# Altium PCB jetson_nano_breakout_rev1.PcbDoc
Units mil, origin at the board's own origin, x right, y up, seen from the top; angles counter-clockwise.
Board outline 3903.1 x 2481.1 mil, 2 copper layers (Top Layer, Bottom Layer); 58 components, 76 nets, 270 pads, 57 vias.
Unrouted connection lines stored in the file: 13.
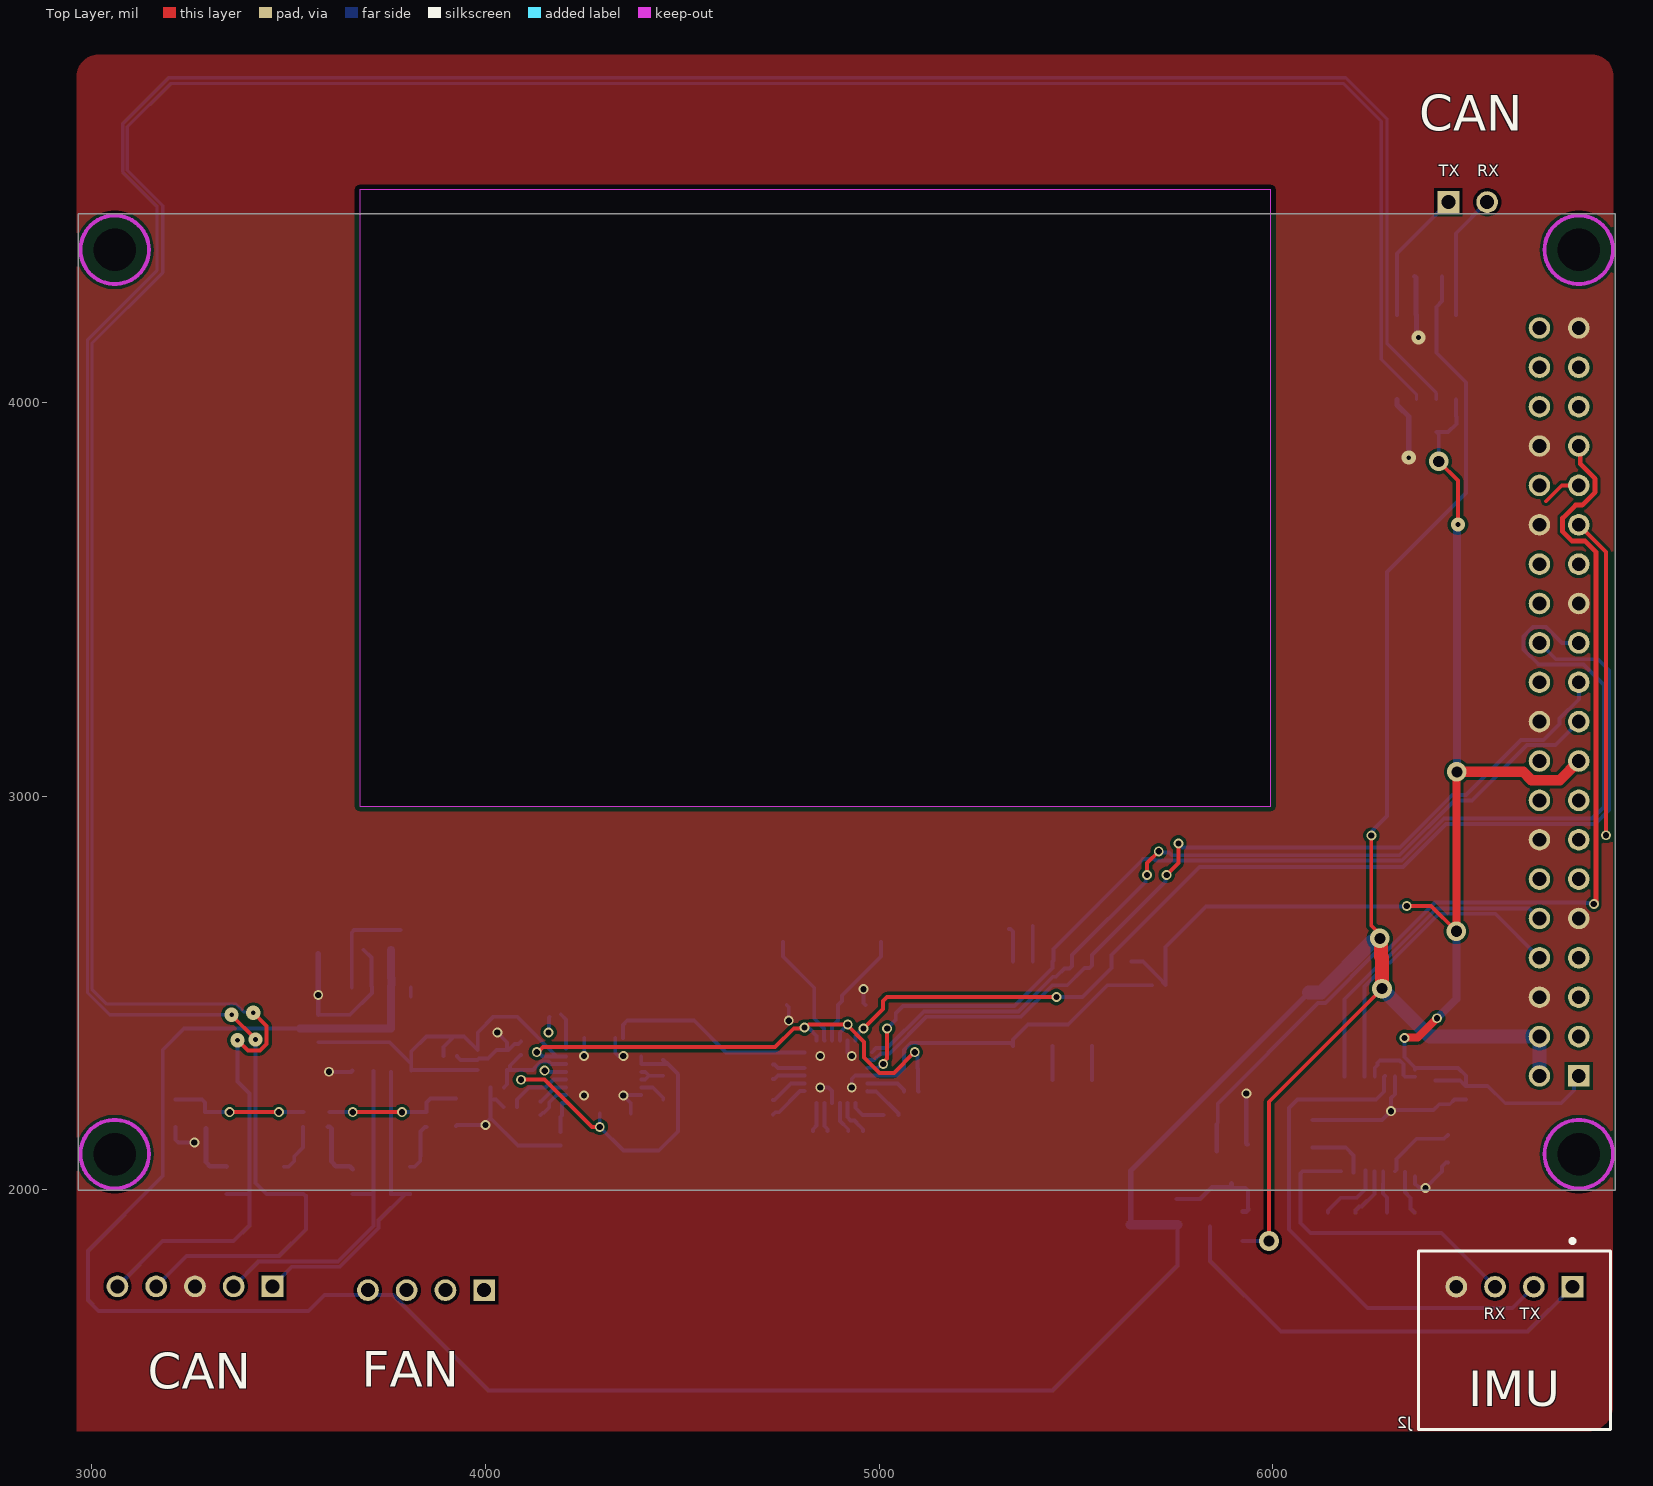
[diagram p0: Top Layer view]
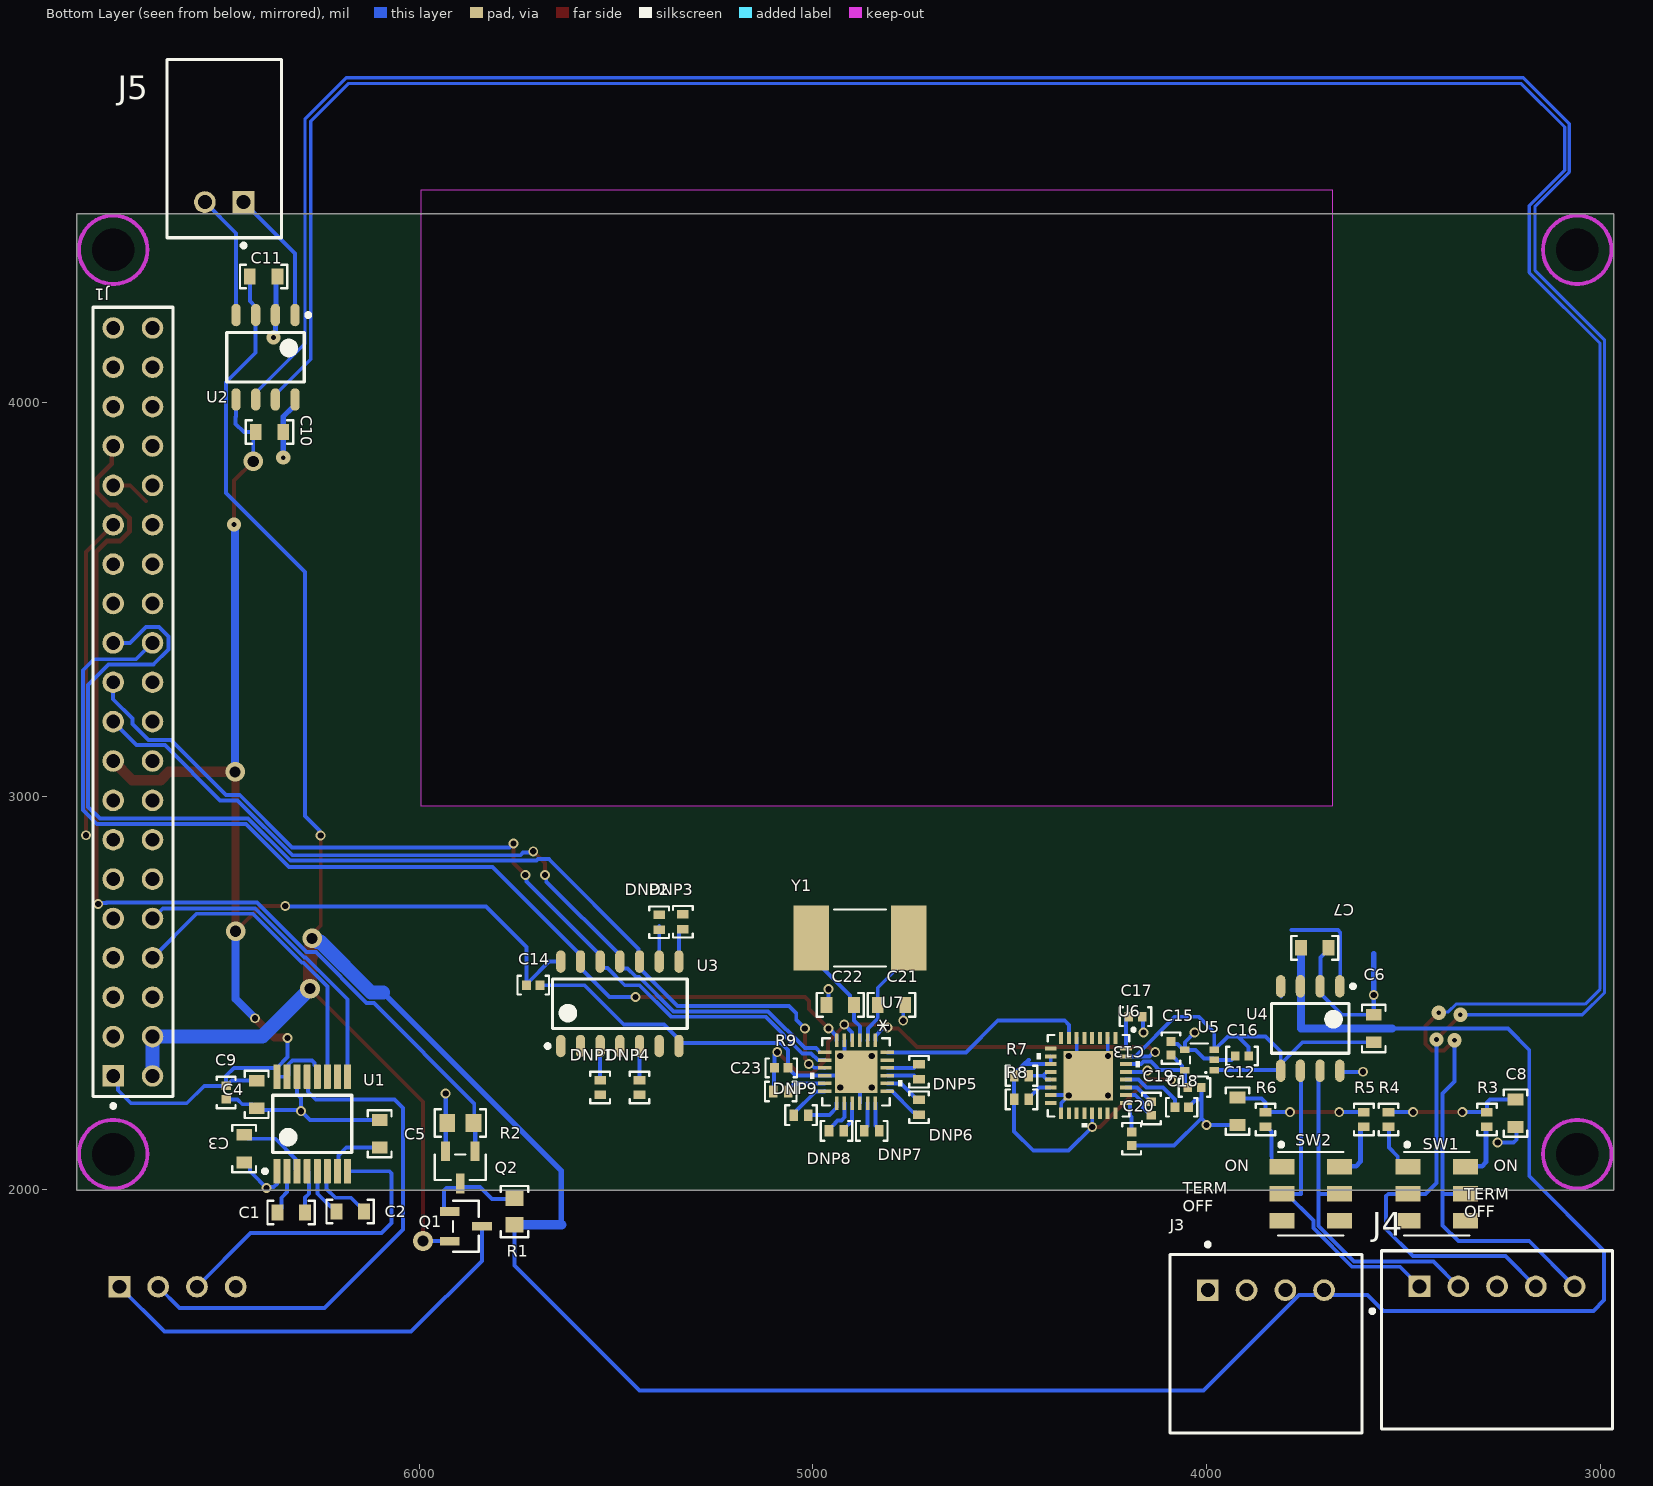
[diagram p1: Bottom Layer view, seen from below]

## Layer stack, top to bottom
Top Solder: solder mask 0.4, Solder Resist, Dk 3.5
Top Layer: signal copper 1.4
Dielectric 1: dielectric 12.6, FR-4, Dk 4.8
Bottom Layer: signal copper 1.4
Bottom Solder: solder mask 0.4, Solder Resist, Dk 3.5

## Board outline
2965.95,1998.95 6869.05,1998.95 6869.05,4480.05 2965.95,4480.05
cut-out: 3680,4541 3680,2974 5995,2974 5995,4541

## Design rules (kind name [scope] priority, off if disabled: settings)
AcuteAngle [All] p1: minimum=8.00000000000000E+0001 checktracksonly=FALSE
BoardOutlineClearance "BoardOutlineClearance JLCPCB" [All] p1: gap=11.81 ignorepadtopadclearanceinfootprint=FALSE
Clearance "Clearance JLCPCB 4 layer" [All] p1: gap=7.87 ignorepadtopadclearanceinfootprint=FALSE except(3.54: Arc-Arc Arc-Track Track-Track; 5: Arc-SMDPad Arc-Via Track-SMDPad Track-Via SMDPad-SMDPad; 9.45: THPad-THPad THPad-Via Via-Via; 10: Arc-Hole Track-Hole SMDPad-Hole THPad-Hole Via-Hole Fill-Hole Poly-Hole Region-Hole Text-Hole)
DiffPairsRouting "Diff Pairs USB 2.0" [InDifferentialPairClass('USB 2.0')] p1: maxlimit=5 minlimit=5 mostfreqgap=5 toplayer_minwidth=7.87 toplayer_maxwidth=7.87 toplayer_prefwidth=7.87 bottomlayer_minwidth=7.87 bottomlayer_maxwidth=7.87 bottomlayer_prefwidth=7.87 impedanceprofiledriven=TRUE impedanceprofileid={9C1C01C3-81FD-4AE1-9E3D-BC841176F5CA} maxuncoupledlength=500
DiffPairsRouting "Diff Pairs PCIe Gen 2" [InDifferentialPairClass('PCIe Gen 2')] p2: maxlimit=5 minlimit=5 mostfreqgap=5 toplayer_minwidth=5.53 toplayer_maxwidth=5.53 toplayer_prefwidth=5.53 bottomlayer_minwidth=5.53 bottomlayer_maxwidth=5.53 bottomlayer_prefwidth=5.53 impedanceprofiledriven=TRUE impedanceprofileid={D86E5A41-F98B-413D-93FD-A6E48D035561} maxuncoupledlength=500
HoleSize "HoleSize JLCPCB Pad" [IsPad] p1: absolutevalues=TRUE maxlimit=248.03 minlimit=19.68 maxpercent=80.000 minpercent=20.000
HoleSize "HoleSize JLCPCB 4 layer Cheap" [All] p2: absolutevalues=TRUE maxlimit=248.03 minlimit=11.81 maxpercent=80.000 minpercent=20.000
HoleToHoleClearance "HoleToHoleClearance JLCPCB Same Net" [All] p1: gap=10 allowstackedmicrovias=TRUE
MinimumAnnularRing "MinimumAnnularRing JLCPCB Via" [All] p1: minimumring=2.95
MinimumAnnularRing "MinimumAnnularRing JLCPCB Pad" [IsPad] p2: minimumring=9.84
MinimumAnnularRing "MinimumAnnularRing JLCPCB 1oz" [All] p3: minimumring=5.12
MinimumSolderMaskSliver "MinimumSolderMaskSliver JLCPCB" [All] p1: minsoldermaskwidth=3.94
PlaneClearance [All] p1: clearance=11.81
PlaneConnect [All] p1: planeconnectstyle=Direct reliefexpansion=20 reliefentries=4 reliefconductorwidth=10 reliefairgap=10
PolygonConnect [All] p1: connectstyle=Direct reliefconductorwidth=15 reliefentries=4 polygonreliefangle="45 Angle" airgapwidth=10
RoomDefinition jetson_nano_breakout_rev1 [InComponentClass('jetson_nano_breakout_rev1')] p1: confinementstyle=ConfineIn formatcopy=TRUE lockcomponents=FALSE outline 10550,1980 9560,1980 9560,2440 10550,2440
RoutingVias "RoutingVias JLCPCB 4 layer" [All] p1: holewidth=19.68 width=39.37 viastyle="Through Hole" minholewidth=11.81 minwidth=17.72 maxholewidth=50 maxwidth=80 useviatemplates=TRUE viatemplateguid#1={E4F56293-08C2-4D19-82C4-AE08438917D5} viatemplateguid#2={1BCA9F14-5F09-4202-A85E-663B4EEF2BCF} viatemplateguid#3={0A06A7A9-53EB-413F-AE2C-1D9530B3FFA7} viatemplatename#1=v64h41 viatemplatename#2=v127h71 viatemplatename#3=v274h274
SilkToSilkClearance [All] p1: silktosilkclearance=3
SilkToSolderMaskClearance "SilkToSolderMaskClearance JLCPCB" [IsPad] p1: minsilkscreentomaskgap=5.91 clearancetoexposedcopper=TRUE
SolderMaskExpansion "SolderMaskExpansion JLCPCB" [All] p1: expansion=1.5 istentingtop=FALSE
SupplyNets "Schematic Supply Nets_3" [InNet('1V8')] p1: voltage=0.000
SupplyNets "Schematic Supply Nets_2" [InNet('+5')] p2: voltage=0.000
SupplyNets "Schematic Supply Nets_1" [InNet('3v3')] p3: voltage=0.000
SupplyNets "Schematic Supply Nets" [InNet('GND')] p4: voltage=0.000
UnRoutedNet [All] p1: checkbadconnections=TRUE
Width "Width JLCPCB 4 layer" [All] p1: maxlimit=196.85 minlimit=3.54 preferedwidth=9.84 minimp=50.000000 maximp=50.000000 favimp=50.000000
21 further rules are at their usual default settings.

## Classes and differential pairs
component class SPItoRS422: C13 C14 C15 C16 C17 C18 C19 C20 C21 C22 C23 DNP5 DNP6 DNP7 DNP8 DNP9 R7 R8 R9 U5 U6 U7 Y1
component class jetson_nano_breakout_rev1: C1 C2 C3 C4 C5 C6 C7 C8 C9 C10 C11 C12 DNP1 DNP2 DNP3 DNP4 J1 J2 J3 J4 J5 Q1 Q2 R1 R2 R3 R4 R5 R6 SW1 SW2 U1 U2 U3 U4

## Components (designator, comment, footprint, x,y, rotation, side; value= is the part's Value field where it differs from the comment)
C1 "100nF Ceramic 6.3V" CAPACITOR_0603 6325,1942.5 r180 bottom value=0.1uF
C2 "100nF Ceramic 6.3V" CAPACITOR_0603 6175,1945 r180 bottom value=0.1uF
C3 "100nF Ceramic 6.3V" CAPACITOR_0603 6444.29,2105 r270 bottom value=0.1uF
C4 "100nF Ceramic 6.3V" CAPACITOR_0603 6412.5,2242.5 r270 bottom value=0.1uF
C5 "100nF Ceramic 6.3V" CAPACITOR_0603 6100,2142.5 r90 bottom value=0.1uF
C6 "1uF Ceramic 16V" CAPACITOR_0603 3575,2410 r90 bottom locked value=1uF
C7 "10uF Ceramic 6.3V" CAPACITOR_0603 3725,2615 r180 bottom locked
C8 "10nF Ceramic 6.3V" CAPACITOR_0603 3215,2195 r90 bottom locked value=10nF
C9 "100nF Ceramic 25V" CAPACITOR_0402 6490,2247.13 r270 bottom value=0.1uF
C10 "1uF Ceramic 16V" CAPACITOR_0603 6380,3925 r180 bottom value=1uF
C11 "10uF Ceramic 6.3V" CAPACITOR_0603 6395,4320 r180 bottom
C12 "10nF Ceramic 6.3V" CAPACITOR_0603 3921.01,2200 r90 bottom locked value=10nF
C13 "100nF Ceramic 25V" CAPACITOR_0402 4030,2260 r180 bottom value=0.1uF
C14 "1uF Ceramic 16V" CAPACITOR_0402 5710,2520 r180 bottom value=1uF
C15 "1uF Ceramic 16V" CAPACITOR_0402 4090,2360 r90 bottom value=1uF
C16 "1uF Ceramic 16V" CAPACITOR_0402 3910,2340 r0 bottom value=1uF
C17 "100nF Ceramic 25V" CAPACITOR_0402 4180,2440 r180 bottom value=0.1uF
C18 "100nF Ceramic 25V" CAPACITOR_0402 4062.87,2210 r180 bottom value=0.1uF
C19 "100nF Ceramic 25V" CAPACITOR_0402 4140,2207.13 r270 bottom value=0.1uF
C20 "100nF Ceramic 25V" CAPACITOR_0402 4190,2130 r270 bottom value=0.1uF
C21 "18pF Ceramic 50V" CAPACITOR_0603 4800,2470 r0 bottom value=18pF
C22 "18pF Ceramic 50V" CAPACITOR_0603 4930,2470 r180 bottom value=18pF
C23 "100nF Ceramic 25V" CAPACITOR_0402 5080,2310 r180 bottom value=0.1uF
DNP1 "DNP" RESISTOR_0402 5540,2260 r270 bottom
DNP2 "DNP" RESISTOR_0402 5390,2680 r270 bottom
DNP3 "DNP" RESISTOR_0402 5330,2681.3 r270 bottom
DNP4 "DNP" RESISTOR_0402 5440,2260 r270 bottom
DNP5 "DNP" RESISTOR_0402 4730,2300 r90 bottom
DNP6 "DNP" RESISTOR_0402 4730,2210 r90 bottom
DNP7 "DNP" RESISTOR_0402 4850,2150 r180 bottom
DNP8 "DNP" RESISTOR_0402 4940,2150 r180 bottom
DNP9 "DNP" RESISTOR_0402 5030,2190 r180 bottom
J1 "7-534206-0" FP-7-534206-0-MFG 6727,3239.5 r90 bottom
J2 "S4B-XH-A(LF)(SN)" JST-S4B-XH-A(LF)(SN)_V 6613.36,1754 r180 top
J3 "S4B-XH-A(LF)(SN)" JST-S4B-XH-A(LF)(SN)_V 3848.81,1745.2 r180 bottom
J4 "S5B-XH-A(LF)(SN)" FP-S5B-XH-A_LF_SN-MFG 3261.85,1619.17 r0 bottom locked
J5 "S2B-XH-A-GU" FP-S2B-XH-A-GU-MFG 6495,4645 r0 bottom
Q1 "MOSFET P-CHANNEL 20V 4.7A SOT23" SOT-23-3 5881.35,1907.5 r270 bottom
Q2 "MOSFET N-CH 30V 5.8A SOT-23-3" SOT-23-3 5895.48,2057.5 r0 bottom
R1 "10k Ohm 5% 1/10W" RESISTOR_0603 5757.5,1945 r90 bottom
R2 "10k Ohm 5% 1/10W" RESISTOR_0603 5895,2170 r0 bottom
R3 "60.4 Ohm 1% 1/16W" RESISTOR_0402 3287.5,2178.7 r90 bottom locked
R4 "60.4 Ohm 1% 1/16W" RESISTOR_0402 3537.5,2178.7 r90 bottom locked
R5 "60.4 Ohm 1% 1/16W" RESISTOR_0402 3600,2178.8 r90 bottom locked
R6 "60.4 Ohm 1% 1/16W" RESISTOR_0402 3850,2178.7 r90 bottom locked
R7 "0 Ohm 1% 1/16W" RESISTOR_0402 4470,2290 r0 bottom
R8 "0 Ohm 1% 1/16W" RESISTOR_0402 4470,2230 r0 bottom
R9 "1k Ohm 1% 1/16W" RESISTOR_0402 5081.3,2250 r0 bottom
SW1 "Switch DPDT" CAS-220TA 3415,1990 r270 bottom locked
SW2 "Switch DPDT" CAS-220TA 3735,1990 r270 bottom locked
U1 "SN65C3221EPWR" PW0016A_M 6271.36,2167.5 r90 bottom
U2 "CAN Transceiver" SOIC-8 6390,4115 r270 bottom
U3 "MCP2517FD" SOIC-14 5490,2472.72 r90 bottom
U4 "CAN Transceiver" SOIC-8 3736.32,2410 r270 bottom locked
U5 "TLV70018DCKR" SOT-353 3980,2330 r90 bottom
U6 "SP335EER1-L" QFN-32 4300,2290 r270 bottom
U7 "PI7C9X760CZDEX" TQFN-24 4890,2300 r270 bottom
Y1 "1.8432MHz" "2-SMD (8x3.7)" 4880,2640 r180 bottom

## Footprints (in the part's own frame and the unit in brackets; to place one, negate y for a bottom-side part, rotate by r counter-clockwise, add the part's x,y. Pads: shape width x height; smd on the part's side, far side on the other; paste and mask are expansions set on the pad)
"2-SMD (8x3.7)" [mm]
  rect 2.3x4.2 smd: 1(-3.15,0) 2(3.15,0)
  silkscreen extent -1.68,-1.85 1.68,1.85, body extent -4,-1.85 4,1.85, height 1.75
CAPACITOR_0402 [mm]
  rect 0.56x0.6 smd: 1(-0.435,0) 2(0.435,0)
  silkscreen extent -1.02,-0.6 1.02,0.6, body extent -0.5,-0.28 0.5,0.27, height 0.51
CAPACITOR_0603 [mil] "CAPACITOR 0603"
  rect 30x40 smd: 1(-35,0) 2(35,0)
  silkscreen extent -60,-30 60,30, body extent -31,-16 31,16, height 31
CAS-220TA [mm] "SWITCH SLIDE DPDT 100MA 6V"
  rrect0% 1x1.6 smd: 1(-1.75,-1.85) 2(0,-1.85) 3(1.75,-1.85) 4(-1.75,1.85) 5(0,1.85) 6(1.75,1.85)
  silkscreen extent -3.3,-2.1 2.7,2.1, body extent -2.7,-2.1 2.7,2.1, height 5.01
FP-7-534206-0-MFG [mm]
  rect 1.39x1.39 hole 0.89 paste-2539.97 mask+0: 1(-24.13,1.27)
  round 1.39 hole 0.89 paste-2539.97 mask+0: 2(-24.13,-1.27) 3(-21.59,1.27) 4(-21.59,-1.27) 5(-19.05,1.27) 6(-19.05,-1.27) 7(-16.51,1.27) 8(-16.51,-1.27) 9(-13.97,1.27) 10(-13.97,-1.27) 11(-11.43,1.27) 12(-11.43,-1.27) 13(-8.89,1.27) 14(-8.89,-1.27) 15(-6.35,1.27) 16(-6.35,-1.27) 17(-3.81,1.27) 18(-3.81,-1.27) 19(-1.27,1.27) 20(-1.27,-1.27) 21(1.27,1.27) 22(1.27,-1.27) 23(3.81,1.27) 24(3.81,-1.27) 25(6.35,1.27) 26(6.35,-1.27) 27(8.89,1.27) 28(8.89,-1.27) 29(11.43,1.27) 30(11.43,-1.27) 31(13.97,1.27) 32(13.97,-1.27) 33(16.51,1.27) 34(16.51,-1.27) 35(19.05,1.27) 36(19.05,-1.27) 37(21.59,1.27) 38(21.59,-1.27) 39(24.13,1.27) 40(24.13,-1.27)
  silkscreen extent -26.19,-2.58 25.47,2.58, body extent -25.4,-2.52 25.4,2.52, height 8.64
FP-S2B-XH-A-GU-MFG [mm]
  rect 1.4x1.4 hole 0.9 paste-2539.97 mask+0: 1(-1.25,3.45)
  round 1.4 hole 0.9 paste-2539.97 mask+0: 2(1.25,3.45)
  silkscreen extent -3.7,-5.75 3.7,6.37, body extent -3.7,-5.75 3.7,5.75, height 5.95
FP-S5B-XH-A_LF_SN-MFG [mm]
  rect 1.4x1.4 hole 0.9 paste-2539.97 mask+0: 1(5,-3.45)
  round 1.4 hole 0.9 paste-2539.97 mask+0: 2(2.5,-3.45) 3(0,-3.45) 4(-2.5,-3.45) 5(-5,-3.45)
  silkscreen extent -7.45,-5.75 8.18,5.75, body extent -7.45,-5.75 7.45,5.75, height 6.15
JST-S4B-XH-A(LF)(SN)_V [mm] "Header, 4-Leads, Body 12.4x11.5mm, Pitch 2.5mm"
  rect 1.4x1.4 hole 0.9: 1(-3.75,0)
  round 1.4 hole 0.9: 2(-1.25,0) 3(1.25,0) 4(3.75,0)
  silkscreen extent -6.2,-3.08 6.2,9.2, body extent -6.2,-2.3 6.2,9.2, height 3.4
PW0016A_M [mm] "SOP, 16-Leads, Body 5.1x4.5mm, Pitch 0.65mm, IPC Low Density"
  rrect22% 1.6x0.45 smd: 1(-3.05,2.275) 2(-3.05,1.625) 3(-3.05,0.975) 4(-3.05,0.325) 5(-3.05,-0.325) 6(-3.05,-0.975) 7(-3.05,-1.625) 8(-3.05,-2.275) 9(3.05,-2.275) 10(3.05,-1.625) 11(3.05,-0.975) 12(3.05,-0.325) 13(3.05,0.325) 14(3.05,0.975) 15(3.05,1.625) 16(3.05,2.275)
  silkscreen extent -3.17,-2.55 1.85,3.18, body extent -3.21,-2.5 3.21,2.5, height 1
QFN-32 [mil]
  rect 30x10 smd paste+0 mask+0: 1(-95.5,68.9) 2(-95.5,49.21) 3(-95.5,29.53) 4(-95.5,9.84) 5(-95.5,-9.84) 6(-95.5,-29.53) 7(-95.5,-49.21) 8(-95.5,-68.9) 17(95.5,-68.9) 18(95.5,-49.21) 19(95.5,-29.53) 20(95.5,-9.84) 21(95.5,9.84) 22(95.5,29.53) 23(95.5,49.21) 24(95.5,68.9)
  rect 10x30 smd paste+0 mask+0: 9(-68.9,-95.5) 10(-49.21,-95.5) 11(-29.53,-95.5) 12(-9.84,-95.5) 13(9.84,-95.5) 14(29.53,-95.5) 15(49.21,-95.5) 16(68.9,-95.5) 25(68.9,95.5) 26(49.21,95.5) 27(29.53,95.5) 28(9.84,95.5) 29(-9.84,95.5) 30(-29.53,95.5) 31(-49.21,95.5) 32(-68.9,95.5)
  rect 126x126 smd paste-62.5 mask+0: 33(0,0)
  silkscreen extent -120,-130 130,130, body extent -99,-99 99,99, height 39
RESISTOR_0402 [mm] "Resistor 0402"
  rect 0.55x0.75 smd: 1(-0.475,0) 2(0.475,0)
  silkscreen extent -1.02,-0.64 1.02,0.64, body extent -0.5,-0.25 0.5,0.25, height 0.25
RESISTOR_0603 [mil] "Resistor 0603"
  rect 40x45 smd: 1(-33.5,0) 2(33.5,0)
  silkscreen extent -65,-35 65,35, body extent -31,-16 31,16, height 16
SOIC-8 [mm] "SOIC, 8-Leads, Body 4.90x3.90mm, Pitch 1.27mm, IPC Medium Density"
  oval 1.45x0.6 smd: 1(-2.725,1.905) 2(-2.725,0.635) 3(-2.725,-0.635) 4(-2.725,-1.905) 5(2.725,-1.905) 6(2.725,-0.635) 7(2.725,0.635) 8(2.725,1.905)
  silkscreen extent -2.85,-2.5 1.6,2.88, body extent -3,-2.5 3,2.5, height 1.75
SOIC-14 [mm] "SOIC, 14-Leads, Body 8.65x3.90mm, Pitch 1.27mm, IPC Medium Density"
  oval 1.45x0.6 smd: 1(-2.725,3.81) 2(-2.725,2.54) 3(-2.725,1.27) 4(-2.725,0) 5(-2.725,-1.27) 6(-2.725,-2.54) 7(-2.725,-3.81) 8(2.725,-3.81) 9(2.725,-2.54) 10(2.725,-1.27) 11(2.725,0) 12(2.725,1.27) 13(2.725,2.54) 14(2.725,3.81)
  silkscreen extent -2.85,-4.35 1.6,4.79, body extent -3,-4.4 3,4.4, height 1.7
SOT-23-3 [mil]
  rect 22x50 smd paste+0 mask+4: 1(-37.5,-41) 2(37.5,-41) 3(0,41)
  silkscreen extent -65,-33 65,33, body extent -60,-52 60,52, height 44
SOT-353 [mm]
  rect 0.42x0.6 smd: 1(-0.65,0) 2(0,0) 3(0.65,0) 4(0.65,1.9) 5(-0.65,1.9)
  silkscreen extent -1.06,0.39 1.06,1.56, body extent -0.99,-0.14 1.01,2.06, height 0.96
TQFN-24 [mil]
  rect 34x9 smd paste+0 mask+0: 1(-79.71,49.21) 2(-79.71,29.53) 3(-79.71,9.84) 4(-79.71,-9.84) 5(-79.71,-29.53) 6(-79.71,-49.21) 13(79.71,-49.21) 14(79.71,-29.53) 15(79.71,-9.84) 16(79.71,9.84) 17(79.71,29.53) 18(79.71,49.21)
  rect 9x34 smd paste+0 mask+0: 7(-49.21,-79.71) 8(-29.53,-79.71) 9(-9.84,-79.71) 10(9.84,-79.71) 11(29.53,-79.71) 12(49.21,-79.71) 19(49.21,79.71) 20(29.53,79.71) 21(9.84,79.71) 22(-9.84,79.71) 23(-29.53,79.71) 24(-49.21,79.71)
  rect 108x108 smd paste-54 mask+0: 25(0,0)
  silkscreen extent -86,-117 86,117, body extent -81,-81 81,81, height 35

## Part data
C1 C2 C3 C4 C5: library part CAPACITOR_0.1uF_0603, "Cap 100nF 6.3V +/-10% / Ceramic 0603", Supplier Part Number 1=399-15351-1-ND, Tolerance="+/- 10%", Voltage=6.3V, ComponentLink1Description=Datsheet, ComponentLink1URL=https://www.mouser.com/datasheet/2/212/KEM_C1002_X7R_SMD-1102033.pdf, Made By="Flip B", Supplier 1=Digi-Key
C6 C10: library part CAPACITOR_1uF_0603, "Cap 1uF 16V +/-10% / Ceramic 0603", Supplier Part Number 1=399-7847-1-ND, Tolerance="+/- 10%", Voltage=16V, Made By="Flip B", Supplier 1=Digi-Key
C7 C11: library part CAPACITOR_10uF_0603, "Cap 10uF 6.3V +/-20% / Ceramic 0603", Supplier Part Number 1=1276-1119-1-ND, Tolerance="+/- 20%", Value (uF)="10 uF", Voltage=6.3V, ComponentLink1Description=Digikey, ComponentLink1URL=https://www.digikey.com/en/products/detail/samsung-electro-mechanics/CL10A106MQ8NNNC/3886777, Made By="Flip B", Supplier 1=Digi-Key
C8 C12: library part CAPACITOR_0.01uF_0603, "Cap 10nF 6.3V +/-20% / Ceramic 0603", Supplier Part Number 1=80-C0603C103K9R, Tolerance="+/- 10%", Voltage=6.3V, ComponentLink1Description=Datsheet, ComponentLink1URL=https://www.mouser.com/datasheet/2/212/KEM_C1002_X7R_SMD-1102033.pdf, Made By="Flip B", Supplier 1=Mouser
C9 C13 C17 C18 C19 C20 C23: library part CAPACITOR_0.1uF_0402, "Cap 100nF 25V +/-10% / Ceramic 0402", Supplier Part Number 1=478-7868-1-ND, Tolerance="+/- 10%", Voltage=25V, Made By="Robert Pafford", Supplier 1=Digi-Key
C14 C15 C16: library part CAPACITOR_1uF_0402, "Cap 1uF 16V +/-10% / Ceramic 0402", Supplier Part Number 1=478-0402YD105KAT4ADKR-ND, Tolerance="+/- 10%", Voltage=16V, Made By="Robert Pafford", Supplier 1=Digi-Key
C21 C22: library part CAPACITOR_0.000018uF_0603, "Cap 18pF 50V +/-5% / Ceramic 0603", Supplier Part Number 1=311-1061-1-ND, Tolerance="+/- 5%", Voltage=50V, ComponentLink1Description=Datsheet, ComponentLink1URL=https://www.mouser.com/datasheet/2/212/KEM_C1002_X7R_SMD-1102033.pdf, Made By="Flip B", Supplier 1=Digi-Key
DNP1 DNP2 DNP3 DNP4 DNP5 DNP6 DNP7 DNP8 DNP9: library part DNP_0402, "Do Not Populate 0402"
J1: library part CMP-03369-000068-1, "CONN RCPT 40POS 0.1 GOLD PCB", Current Rating=2A, Manufacturer="TE Connectivity", Temperature="-65°C to +105°C", Temperature Range High=+105°C, Temperature Range Low=-65°C, Voltage Rating=333V, Automotive=No, Category=Conn, ComponentLink2Description=Datasheet, ComponentLink2URL=https://octopart.com/datasheet/7-534206-0-te+connectivity-39516831, Conn Gender=Female, Conn Orientation=Vertical, Contact Material=Gold,Nickel, Device Class L1=Connectors, Device Class L2="Headers and Wire Housings", Device Class L3=unset, Digikey Description="CONN RCPT 40POS 0.1 GOLD PCB", Footprint Url=https://www.mouser.in/datasheet/2/418/NG_CD_534206_R7-1252933.pdf, Height=8.9mm, Is Female=yes, Lead Free=Yes, Manufacturer Part Number=7-534206-0, Mouser Description="Headers & Wire Housings REC 2X20P VRT T/H", Number of Contacts=40, Number Of Rows=2, Octopart=https://octopart.com/7-534206-0-te+connectivity-39516831, Package=7-534206-0, Pitch=2.54mm, RoHS=TRUE, Standoff Height=0.38mm
J2 J3: library part CMP-1755-00007-1, "Male Header, Pitch 2.5 mm, 1 x 4 Position, Height 6.1 mm, Tail Length 3.4 mm, -25 to 85 degC, RoHS, Bulk", ComponentLink1Description="Manufacturer URL", ComponentLink1URL=http://www.jst.com/home2.html, ComponentLink2Description=Datasheet, ComponentLink2URL=http://www.jst-mfg.com/product/pdf/eng/eXH.pdf, DatasheetVersion=May-16, PackageDescription="Male Header, Pitch 2.5 mm, 1 x 4 Position, Height 6.1 mm, Tail Length 3.4 mm", PackageReference=S4B-XH-A(LF)(SN)
J4: library part CMP-17439-000302-1, "CONN HEADER R/A 5POS 2.5MM", Color=Natural, Contact Resistance=10mR, Current Rating=3A, Flammability Rating="UL94 V-0", Insulation Resistance=1GR, Max Operating Temperature=85°C, Min Operating Temperature=-25°C, Voltage Rating=250V, Connector Type=Header, Contact Finish - Mating=TIN, Contact Material=Brass, Contact Plating=Tin, Contact Shape=Square, Contact Type="Male Pin", Fastening Type=Detent, Insulation Color=Natural, Insulation Material=Nylon, Lead Free="Lead Free", Lead Pitch=2.5mm, Mount="Through Hole", Number of Contacts=5, Number of Positions=5, Number Of Rows=1, Orientation="Right Angle", Packaging=Bulk, Pitch=2.5mm, REACH SVHC="No SVHC", Series=XH, Termination=Solder, Voltage Rating (AC)=250V, Wire/Cable Gauge=22AWG
J5: library part CMP-17439-000226-1, "Conn Shrouded Header HDR 2 POS 2.45mm Solder ST Top Entry Thru-Hole", Lead Free="Lead Free"
Q1: library part TSM500P02CX, "P-Channel 20 V 4.7A (Tc) 1.56W (Tc) Surface Mount SOT-23", Amp Rating="4.7 A", Package="TO-236-3, SC-59, SOT-23-3", Power Dissipation="1.56W (Tc)", Supplier Part Number 1=TSM500P02CXRFGCT-ND, Created By="Robert Pafford", FET Type=P-Channel, Manufacturer_Part_Number=TSM500P02CX, Rds (on)="50mOhm @ 3A, 4.5V", Supplier 1=Digi-Key, Vdss="20 V", Vendor="Taiwan Semiconductor Corporation", Vgs (Max)=±10V, Vgs (th)="800mV @ 250µA"
Q2: library part AO3404A, "N-Channel 30 V 5.8A (Ta) 1.4W (Ta) Surface Mount SOT-23-3", Amp Rating="5.8 A", Package=SOT23-3L, Power Dissipation="1.4W (Ta)", Supplier Part Number 1=785-1004-1-ND, Created By="Dylan T", FET Type=N-Channel, Manufacturer _Part_Number=AO3404A, Rds (on)="28mOhm @ 5.8A, 10V", SourceLibrary=ON_Semiconductor_2020-01-13, Supplier 1=Digi-Key, Vdss=30V, Vendor="Alpha & Omega Semiconductor Inc.", Vgs (Max)="3V @ 5.8A, 10V", Vgs (th)="3V @ 250µA"
R1 R2: library part RESISTOR_10K_0603, "RES 10k OHM 5% 1/10W 0603", Digikey Part Numer=CR0603-JW-104ELFTR-ND, Supplier Part Number 1=2019-RK73B1JTTD103JCT-ND, Tolerance="+/- 5%", Value  (Ohms)=10K, ComponentLink1Description=Datasheet, ComponentLink1URL=https://www.bourns.com/docs/product-datasheets/CRxxxxx.pdf, Made By="Robert Pafford", Supplier=Digikey, Supplier 1=Digi-Key, Wattage=1/8W
R3 R4 R5 R6: library part RESISTOR_60.4_0402, "RES 60.4 OHM 1% 1/16W 0402", Digikey Part Numer=CR0603-JW-104ELFTR-ND, Supplier Part Number 1=13-AC0402FR-0760R4LCT-ND, Tolerance="+/- 1%", Value  (Ohms)=60.4, Made By="Robert Pafford", Supplier=Digikey, Supplier 1=Digi-Key, Wattage=1/16W
R7 R8: library part RESISTOR_0_0402, "RES 0 OHM 1% 1/16W 0402", Supplier Part Number 1=13-AC0402FR-070RLCT-ND, Tolerance="+/- 1%", Value  (Ohms)=0, Made By="Robert Pafford", Supplier 1=Digikey, Wattage=1/16W
R9: library part RESISTOR_1K_0402, "RES 1k OHM 1% 1/16W 0402", Digikey Part Numer=CR0603-JW-104ELFTR-ND, Supplier Part Number 1=13-AC0402FR-131KLCT-ND, Tolerance="+/- 1%", Value  (Ohms)=1K, Made By="Robert Pafford", Supplier=Digikey, Supplier 1=Digi-Key, Wattage=1/16W
SW1 SW2: library part CAS-220TA_CAN_TERM, "GOLD SWITCH FLUSH SLIDE DPDT 100MA 6V", Current Rating="100 mA", Supplier Part Number 1=CAS220JCT-ND, Voltage Rating=6VDC, Contact Finish=Gold, Made By="Robert Pafford", Supplier 1=Digi-Key, Switch Function=DPDT
U1: library part CMP-0299-01595-2, "3-V to 5.5-V Single-Channel RS-232 1-Mbit/s Line Driver / Receiver with ±15-kV IEC ESD Protection, -40 to 85 degC, 16-Pin SSOP (DB), Green (RoHS & no Sb/Br)", Drivers Per Package=1, Supply Voltage(s)(V)="3.3 or 5.0", ComponentLink1Description="Manufacturer URL", ComponentLink1URL=www.ti.com, ComponentLink2Description=Datasheet, ComponentLink2URL=http://www.ti.com/general/docs/lit/getliterature.tsp?genericPartNumber=SN65C3221E&fileType=pdf, ComponentLink3Description="Package Specification", ComponentLink3URL=http://www.ti.com/litv/pdf/mpds361, DatasheetVersion=SLLS694B, ESD HBM(kV)=+/-15, ICC(Max)(mA)=1, IEC-61000-4-2 SUPPORT=TRUE, PackageDescription="16-Pin Plastic Thin Small Outline Package 5 x 4.4 mm Body ,0.65 mm Pitch", PackageReference=PW0016A, PackageVersion="revG, Feb-2011", Receivers Per Package=1, RS-232=TRUE, Single Supply=TRUE, SubFamily=RS-232
U2 U4: library part TJA1442AT, "CAN Interface IC High-Speed CAN Transceiver with Standby Mode", Supplier Part Number 1=771-TJA1442AT/0Z, Made By="Robert Pafford", Max Data Rate=5Mbps, Supplier 1=Mouser
U3: "CANbus Controller CAN 2.0 SPI Interface 14-SOIC", Made By="Robert Pafford", Max FD Rate="8 Mbps"
U5: "Fixed Positive LDO Regulator, 1.8V, PMOS, PDSO5", Max Voltage="5.5 V", Min Voltage="2 V", Output Current="200 mA", Output Voltage="1.8 V", Supplier Part Number 1=595-TLV70018DCKR, Made By="Ethan Rosati", Supplier 1=Mouser
U6: "1/1, 2/2 Transceiver Full RS232, RS422, RS485 32-QFN (5x5)", Supplier Part Number 1=1016-1969-ND, Supply Voltage="3V - 5.5V", Created By="Ethan Rosati", Supplier 1=Digikey
U7: "I2C Bridge, I2C/SPI to UART UART Interface 24-TQFN (4x4)"
Y1: library part CRYSTAL_1.8432MHz, "CRYSTAL 1.8432MHZ 10PF SMD"

## Free pads (board coordinates)
  round 0 hole 108: 3(3058,2091) 3(3058,4388) 3(6777,2091) 3(6777,4388)

## Via types
v1: diameter 25, hole 16, Top Layer to Bottom Layer, 44 vias
v2: diameter 36, hole 12, Top Layer to Bottom Layer, tented both sides, 7 vias
v3: diameter 50, hole 28, Top Layer to Bottom Layer, 6 vias

## Nets (pads, with @x,y where several pads share a name; then routed paths per layer and width w, separated by ;. In a path a pad name is that pad's centre, name@x,y a point inside that pad or via, vN(x,y) a via of type N, cw(c..) or ccw(c..) an arc to the next point about the centre after c; other vN are vias at no path point)
1V8: C13.1 C15.1 R7.2 R8.2 U5.5 U6.10 U6.11 U6.21 U6.30 | length 1075.8
  Top Layer w9.84: v1(4090,2280) 4150,2280 4270,2160 v1(4290,2160)
  Bottom Layer w9.84: C13.1 4047.13,2260.79 4054.8,2268.46 U5.5 U5.5@4058.35,2304.41 ; C15.1 4089.21,2342.87 4061.69,2315.35 4061.69,2307.76 U5.5@4058.35,2304.41 ; U6.30 4165.81,2319.53 4159.49,2325.84 4140.51,2325.84 4127.08,2312.42 4127.08,2310.95 4120.54,2304.41 U5.5@4058.35,2304.41 ; U6.21 4290.08,2194.42 4290.08,2160.08 v1(4290,2160) 4350,2100 4440,2100 4488.7,2148.7 R8.2 4488.7,2293.94 4463.11,2319.53 ; U6.10 U6.11 4463.11,2319.53 ; 4450,2330 4452.64,2330 4463.11,2319.53
3v3: C4.1 C6.1 C9.1 C10.1 C14.1 C16.1 C23.1 J1.1 J1.17 R9.2 U1.12 U1.15 U1.16 U2.5 U3.14 U4.5 U5.1 U5.3 U6.31 U7.1 U7.4 | length 6379.2
  Top Layer w9.84: v1(4130,2350) 4133.34,2350 4146.27,2362.92 4735.34,2362.92 4782.74,2410.32 4807.91,2410.32 v1(4810,2412.42) 4814.1,2412.42 4821.69,2420 v1(4920,2420) 4920,2417.58 4961.7,2375.88 4961.7,2335.88 5000.51,2297.08 5037.08,2297.08 v1(5090,2350) ; v1(6340,2721.41) 6401.59,2721.41 v3(6466,2657) ; v3(6421.23,3850.6) 6470,3801.83 v2(6470,3690)
  Top Layer w20: v1(6334,2386) 6334.96,2386.96 6367.96,2386.96 v1(6417,2436) ; v3(6466,2657) 6466.6,2657.6 6466.6,3061.2 v3(6467.2,3061.8)
  Top Layer w27: v3(6467.2,3061.8) 6635.78,3061.8 6656.81,3040.76 6728.26,3040.76 J1.17
  Bottom Layer w9.84: C6.1 3755.77,2375 U4.5@3811.32,2319.45 ; C16.1 3892.87,2362.87 3920,2390 ; U5.1 3813.01,2304.41 U4.5 U4.5@3811.32,2319.45 ; v1(4130,2350) 4134.1,2350 4144.87,2339.23 4180.69,2339.23 ; 4180.71,2339.21 U6.31 ; 4180.71,2339.29 4080,2440 4020,2440 3980,2400 U5.3 3945.59,2390 3920,2390 ; v1(4810,2412.42) 4812.9,2409.52 4822.64,2409.52 4840.79,2391.37 U7.1 ; U7.4 4900.26,2380.13 4900.26,2400.26 v1(4920,2420) ; v1(5090,2350) 5097.13,2342.87 C23.1 5098.56,2308.56 5098.56,2251.44 R9.2 ; U3.14 5669.74,2580 5721.02,2528.72 5721.02,2526.1 C14.1 5727.13,2617.13 5830,2720 v1@6340,2720 ; U1.12 6258.56,2310.22 6265.37,2317.03 6265.37,2322.04 6272.33,2329 6321.57,2329 6331.4,2319.17 6331.4,2291.52 U1.15 U1.16 ; v1(6334,2386) 6334,2337.14 U1.16@6360.92,2310.22 ; U1.16@6360.92,2306.06 6364.86,2310 6470,2310 6490,2290 C9.1 ; C4.1 6475.96,2277.5 6489.21,2264.25 C9.1 ; v3(6421.23,3850.6) 6421.23,3918.77 C10.1 6445,3925 6465.92,3945.92 6465.92,3963.49 6465,3964.41 U2.5 ; J1.1 6764.71,2277.21 6764.71,2253.14 6731.57,2220 6590,2220 6545.75,2264.25 C9.1 ; U4.5@3811.32,2319.45 3811.32,2351.32 3850,2390 3920,2390
  Bottom Layer w20: v1(6417,2436) 6466,2485 v3(6466,2657) ; v3(6467.2,3061.8) 6467.2,3687.2 v2(6470,3690)
+5: C7.1 C11.1 J1.2 J1.4 Q1.2 R1.1 U2.3 U4.3 | length 9107.6
  Top Layer w9.84: v3(5990,1870) 5990,2224 v3(6277,2511)
  Top Layer w10: v1(6250,2900) 6249.75,2899.75 6249.75,2671.58 6271.58,2649.75 v3(6271.58,2638.93)
  Top Layer w36: v3(6271.58,2638.93) 6274.26,2636.25 6274.26,2592.74 6277,2590 v3(6277,2511)
  Bottom Layer w9.84: Q1.2 v3(5990,1870)
  Bottom Layer w10: 3528.05,2410 3234.11,2410 3180,2355.89 3180,2035 2990,1845 2990,1720 3017.17,1692.83 3550,1692.83 3590.43,1733.27 3764.57,1733.27 3805,1692.83 4007.83,1490 5440,1490 5757.5,1807.5 R1.1 ; v1(6250,2900) 6252.87,2902.87 6252.87,2912.87 6290,2950 6290,3570 6490,3770 6490,4051.51 6415,4126.51 U2.3 6415,4242.7 6430,4257.7 C11.1
  Bottom Layer w14: 5638.5,1911.5 5638.5,2048.5 6091.41,2501.41
  Bottom Layer w20: 3528.05,2410 3760,2410 ; 3760,2415.86 U4.3@3760,2517.79 ; C7.1@3760,2610 3760,2537.89 3760.62,2537.27 U4.3@3760.62,2521.92
  Bottom Layer w25: 5638.5,1911.5 R1.1
  Bottom Layer w36: 6091.41,2501.41 6122.1,2501.41 6251.16,2630.47 6259.33,2630.47 6267.79,2638.93 v3(6271.58,2638.93) ; v3(6277,2511) 6398.5,2389.5 J1.4 J1.2
can0_din: U3.2 U4.4 | length 23.9
  Bottom Layer w9.84: U4.4@3810,2490.55 U4.4@3810,2514.46
can0_dout: U3.1 U4.1 | length 266.6
  Bottom Layer w9.84: U4.1@3660,2514.04 3660,2654.23 3665.77,2660 3784,2660
can1_din: J5.2 U2.4 | length 319.7
  Bottom Layer w10: U2.4 6465,4429.96 J5.2
can1_dout: J5.1 U2.1 | length 341.1
  Bottom Layer w10: U2.1 6315,4378.39 J5.1
GND: C3.2 C4.2 C5.2 C6.2 C7.2 C8.1 C9.2 C10.2 C11.2 C12.1 C13.2 C14.2 C15.2 C16.2 C18.2 C20.2 C21.1 C22.1 C23.2 J1.6 J1.9 J1.14 J1.20 J1.25 J1.30 J1.34 J1.39 J2.4 J4.3 Q2.2 R2.2 U1.1 U1.14 U2.2 U2.8 U3.7 U4.2 U4.8 U5.2 U5.4 U6.2 U6.6 U6.15 U6.17 U6.20 U6.33 U7.5 U7.10 U7.16 U7.25 | length 3655.5
  Bottom Layer w9.84: C6.2 3655.77,2445 ; U4.2@3711.32,2500.55 U4.2 ; C12.1@3925,2162.5 3927.5,2165 v1(4000,2165) 4000,2169.1 4012.87,2181.98 ; C16.2 3927.13,2339.21 3936.34,2330 U5.2 3983.35,2333.35 4005.98,2333.35 4028.23,2355.59 U5.4 ; C13.2 4012.87,2230 ; v1(4030,2400) 4054.8,2375.2 U5.4 ; C18.2 4045.75,2210.79 4026.54,2230 4012.87,2230 ; C15.2 4083.9,2371.02 4073.78,2371.02 4058.35,2355.59 U5.4 ; C20.2 4081.98,2112.87 4012.87,2181.98 ; v1(4250,2340) 4250.79,2340.79 U6.2 ; U6.6 4329.53,2348.08 4337.61,2340 v1(4350,2340) ; U6.17 4368.9,2221.1 v1(4350,2240) 4350.79,2240.79 U6.15 ; C21.1 4770,2465 v1(4770,2430) ; v1(4850,2260) 4871.08,2260 4880.16,2250.92 U7.16 ; U7.5 4919.53,2349.08 4928.61,2340 v1(4930,2340) ; v1(4930,2260) 4930,2281.08 4939.08,2290.16 U7.10 5043.82,2290.16 5062.87,2309.21 5062.87,2355.29 5080.51,2372.92 5333.63,2372.92 5340,2366.56 U3.7 5340,2382.17 5377.83,2420 5480,2420 5580,2520 C14.2 ; v1(4960,2510) 4960,2475 C22.1 ; C5.2 6277.5,2177.5 v1(6300,2200) ; C4.2 6422.58,2217.58 6449.13,2217.58 6461.56,2230 C9.2 ; 6425,2042.5 6429.21,2046.71 6429.21,2059.92 6439.29,2070 C3.2 ; 4012.87,2181.98 4012.87,2230
  Bottom Layer w10: C8.1@3212.5,2160 3212.5,2127.37 3219.53,2120.34 v1(3260.34,2120.34) ; v1(3602.49,2299.99) U4.8@3658.59,2299.99 ; 3655.77,2445 U4.2@3711.32,2500.55 ; C7.2@3690,2610 3710,2590 U4.2@3710,2518.16 ; v1(6300,2200) 6300,2233.26 6309.74,2243 U1.14 ; v1@6303.09,2206.71 6303.09,2204.4 v1@6303.74,2203.74 ; v1@6304.62,2202.87 6407.87,2202.87 C4.2 ; U1.1@6361.35,2034.07 6361.35,2015.5 6369.36,2007.49 v1@6385.01,2007.49 ; v1(6387.5,2005) 6425,2042.5
  Bottom Layer w12: C6.2 v1(3575,2495) ; U4.8@3658.59,2299.99 U4.8 ; v1(5932.5,2245) 5932.5,2117.5 5933.75,2116.25 Q2.2@5936.25,2116.25
  Bottom Layer w13: v1(3575,2495) 3575,2600 ; U2.8 6315,3993.86 6319.91,3988.95 6320.55,3988.95 6345,3964.5 C10.2 v2(6345,3860) ; C11.2 6362.97,4317.03 6362.97,4224.32 U2.2 6365,4170 v2(6370,4165)
  other v1: 4250,2240 4850,2340
GPIO07/PWM: J1.32 U3.6
GPIO09: J1.7
GPIO11: J1.31 U3.4 | length 100
  Top Layer w9.84: 6693.63,3749.34 6733.79,3789.5 J1.31
GPIO12: J1.15
GPIO13: J1.33 Q2.1 R2.1 | length 2559.3
  Top Layer w12: J1.33 6780.68,3885.82 6780.68,3844.14 6818.24,3806.58 6818.24,3772.42 6785.32,3739.5 6768.68,3739.5 6735.76,3706.58 6735.76,3672.42 6759.92,3648.26 6792.74,3648.26 6820.5,3620.5 6820.5,2731.5 v1@6819,2730
  Bottom Layer w9.84: R2.1@5860,2171.5 5860,2220
  Bottom Layer w10: 5860,2220 6114.87,2474.87 6133.1,2474.87 6262.15,2603.93 6286.07,2603.93 6411.88,2729.74 6793.67,2729.74 6794.28,2729.13 6812.39,2729.13 v1(6815.26,2726.26)
  Bottom Layer w12: Q2.1@5857.5,2098.5 R2.1@5857.5,2166
NetC1_1: C1.1 U1.2 | length 113.5
  Bottom Layer w10: U1.2@6335,2045.67 6335,1995 6350,1980 6350,1952.5 C1.1
NetC1_2: C1.2 U1.4 | length 109.1
  Bottom Layer w10: U1.4@6280.29,2047.31 6280.29,2015.36 6280,2015.07 6280,1990.31 6290,1980.31 C1.2
NetC2_1: C2.1 U1.5 | length 128
  Bottom Layer w10: C2.1@6210,1942.5 6210,1947.5 6220,1957.5 6225,1957.5 6258.56,1991.06 U1.5
NetC2_2: C2.2 U1.6 | length 169.9
  Bottom Layer w10: C2.2@6140,1942.5 6140,1947.5 6172.5,1980 6212.5,1980 6235,2002.5 U1.6@6235,2049.65
NetC3_1: C3.1 U1.3 | length 189.2
  Bottom Layer w10: U1.3 6313.6,2051.28 6313.6,2079.04 6364.56,2130 6434.29,2130 C3.1
NetC5_1: C5.1 U1.7 | length 156.1
  Bottom Layer w10: C5.1 6185,2107.5 6205,2087.5 U1.7@6205,2044.73
NetC8_2: C8.2 R3.2 R4.2 | length 353
  Top Layer w9.84: v1(3349.95,2197.55) v1(3475,2197.5)
  Bottom Layer w9.84: 3287.5,2222.5 3287.5,2197.5 v1(3349.95,2197.55)
  Bottom Layer w10: C8.2@3212.5,2230 C8.2 3280,2230 3287.5,2222.5 ; v1(3475,2197.5) R4.2@3537.45,2197.45
NetC12_2: C12.2 R5.2 R6.2 | length 350.4
  Top Layer w9.84: v1(3662.5,2197.5) v1(3787.5,2197.5)
  Bottom Layer w10: R5.2@3603.94,2197.5 v1(3662.5,2197.5) ; v1(3787.5,2197.5) 3787.5,2197.4 R6.2 3850,2222.5 3860,2232.5 C12.2@3925,2232.5
NetC17_1: C17.1 U6.32 | length 93
  Bottom Layer w9.84: C17.1@4190.91,2446.22 4204.5,2432.63 U6.32
NetC17_2: C17.2 U6.29 | length 97
  Bottom Layer w9.84: v1(4150,2302.92) 4154.1,2302.92 4157.18,2299.84 U6.29 ; v1(4160,2400) 4161.44,2401.44 4161.44,2438.56 C17.2
NetC18_1: C18.1 U6.28 | length 165.3
  Bottom Layer w9.84: C18.1 4080,2230 4110,2260 4152.42,2260 4172.57,2280.16 U6.28
NetC19_1: C19.1 U6.27 | length 80
  Bottom Layer w9.84: C19.1 4140.79,2224.25 4146.89,2230.35 4146.89,2231.14 4176.22,2260.47 U6.27
NetC19_2: C19.2 U6.26 | length 92.9
  Bottom Layer w9.84: C19.2 4146.1,2196.1 4148.72,2196.1 4161.73,2209.12 4161.73,2221.73 4180.79,2240.79 U6.26
NetC20_1: C20.1 U6.25 | length 85.8
  Bottom Layer w9.84: C20.1 4190,2184.92 4194.42,2189.34 4194.42,2221.02 4194.5,2221.1 U6.25
NetC21_2: C21.2 U7.2 Y1.2 | length 293.6
  Bottom Layer w9.84: Y1.2@4755.98,2630 4755.98,2592.6 4835,2513.58 C21.2 4835,2435.24 4860.05,2410.19 4860.05,2380.13 U7.2
NetC22_2: C22.2 U7.3 Y1.1 | length 301.6
  Bottom Layer w9.84: U7.3 4880.16,2415.72 4895,2430.56 C22.2 4905.08,2480.08 4905.08,2493.66 5004.02,2592.6 Y1.1@5004.02,2630
NetDNP1_1: DNP1.1 U3.3 | length 86.7
  Bottom Layer w9.84: DNP1.1 U3.3
NetDNP2_2: DNP2.2 U3.9 | length 91.3
  Bottom Layer w9.84: U3.9 DNP2.2@5390,2662.6 ; DNP2.2 DNP2.2@5390,2670
NetDNP3_2: DNP3.2 U3.8 | length 89
  Bottom Layer w9.84: DNP3.2 5333.94,2662.6 5340,2656.54 U3.8
NetDNP4_1: DNP4.1 U3.5 | length 86.7
  Bottom Layer w9.84: DNP4.1 U3.5
NetDNP5_1: DNP5.1 U7.21 | length 84
  Bottom Layer w9.84: DNP5.1 4733.94,2281.3 4742.8,2290.16 U7.21
NetDNP5_2: DNP5.2 U7.22 | length 84
  Bottom Layer w9.84: DNP5.2 4733.94,2318.7 4742.8,2309.84 U7.22
NetDNP6_1: DNP6.1 U7.19 | length 104.9
  Bottom Layer w9.84: DNP6.1 4735.91,2197.2 4745.05,2197.2 4798.63,2250.79 U7.19
NetDNP6_2: DNP6.2 U7.20 | length 97.6
  Bottom Layer w9.84: DNP6.2 4733.94,2228.7 4775.71,2270.47 U7.20
NetDNP7_1: DNP7.1 U7.17 | length 73.7
  Bottom Layer w9.84: U7.17 4860.47,2162.17 4868.7,2153.94 DNP7.1
NetDNP7_2: DNP7.2 U7.18 | length 74.2
  Bottom Layer w9.84: DNP7.2 4831.3,2153.94 4840.79,2163.43 U7.18
NetDNP8_1: DNP8.1 U7.14 | length 92.1
  Bottom Layer w9.84: U7.14 4919.53,2184.47 4927.32,2176.67 4936.87,2176.67 4942.64,2170.9 4942.64,2170 4958.7,2153.94 DNP8.1
NetDNP8_2: DNP8.2 U7.15 | length 79.2
  Bottom Layer w9.84: U7.15 4899.84,2175.39 4921.3,2153.94 DNP8.2
NetDNP9_1: DNP9.1 U7.12 | length 106.5
  Bottom Layer w9.84: U7.12 4970.13,2250.37 4992.27,2250.37 5048.7,2193.94 DNP9.1
NetDNP9_2: DNP9.2 U7.13 | length 91.5
  Bottom Layer w9.84: U7.13 4939.21,2208.63 4957.85,2190 DNP9.2
NetJ2_1: J2.1 Q1.3 | length 1130.1
  Bottom Layer w10: Q1.3 5840.35,1819.65 6020,1640 6165,1640 6647,1640 J2.1
NetJ2_2: J2.2 U1.13 | length 1335.9
  Bottom Layer w10: U1.13@6285,2289.84 6281.9,2286.74 6281.9,2249.4 6262.5,2230 6062.5,2230 6040.5,2208 6040.5,1899.5 6240,1700 6608.57,1700 J2.2
NetJ2_3: J2.3 U1.8 | length 793.4
  Bottom Layer w10: U1.8@6172.93,2047.42 6075.39,2047.42 6069.53,2041.56 6069.53,1915.47 6095,1890 6428.15,1890 J2.3
NetJ4_1: J4.1 SW2.2 U4.6 | length 803.9
  Bottom Layer w9.84: 3760,1990 SW2.2@3796.02,1990
  Bottom Layer w10: J4.1 3508.43,1804.73 3630.27,1804.73 3728.54,1903 3728.54,1922.52 3796.02,1990 SW2.2 ; 3760,1990 U4.6@3760,2300
NetJ4_2: J4.2 SW2.5 U4.7 | length 864.8
  Bottom Layer w10: J4.2 3423.55,1818.27 3624.66,1818.27 3715,1908.61 3715,1990 ; SW2.5 3715,1990 ; U4.7@3715,2302.18 3715,1990
NetJ4_4: J4.4 SW1.2 U2.6 | length 7892.2
  Top Layer w10: v2(3355,2445) 3355,2443.7 3415.4,2383.3 v2(3415.4,2382)
  Bottom Layer w8: v2(3355,2445) 3325,2445 3045,2445 2988.46,2501.54 2988.46,4158.46 3165,4335 3165,4498.68 3078.46,4585.22 3078.46,4708.46 3195,4825 6185,4825 6290,4720 6290,4149.45 6415,4024.45 U2.6
  Bottom Layer w10: J4.4 3240.24,1831.82 3475.6,1831.82 3543.78,1900 3543.78,1984.14 3537.92,1990 3443.36,1990 3415.4,2017.95 v2(3415.4,2382)
NetJ4_5: J4.5 SW1.5 U2.7 | length 7875.2
  Top Layer w10: v2(3370,2380) 3396,2354 3427,2354 3443.4,2370.4 3443.4,2416.6 v2(3410,2450)
  Bottom Layer w8: v2(3410,2450) 3407.7,2452.3 3385.88,2452.3 3366.18,2472 3323,2472 3038,2472 3000,2510 3000,4150 3180,4330 3180,4500 3090,4590 3090,4700 3200,4810 6180,4810 6275,4715 6275,4110 6353.94,4031.06 6354.16,4031.06 6365,4020.22 U2.7
  Bottom Layer w9.84: SW1.5 3400,1990
  Bottom Layer w10: J4.5 3180,1870 3360,1870 3400,1910 3400,1990 3400,2245 3370,2275 v2(3370,2380)
NetQ1_1: Q1.1 Q2.3 R1.2 | length 272.3
  Bottom Layer w10: R1.2@5754.64,1977.36 5814.86,1977.36 5845,2007.5 Q2.3@5890,2007.5 ; Q2.3@5895,2005.51 5930.2,2005.51 5937.23,1998.49 Q1.1@5937.23,1950
  Bottom Layer w12: Q2.3@5895,2005.51 Q2.3@5895,2012.5 ; Q1.1@5923.5,1945 5932.23,1945 Q1.1@5937.23,1950 ; Q2.3@5895,2012.5 5895,2016.5 Q2.3@5895,2012.5
NetR3_1: R3.1 SW1.4 | length 142.8
  Bottom Layer w12: R3.1@3290,2156.05 3290,2070 3299.7,2060.3 3340.76,2060.3 SW1.4
NetR4_1: R4.1 SW1.1 | length 128.1
  Bottom Layer w10: SW1.1 3499.35,2058.9 3514.03,2073.58 3514.03,2085.09 3536.68,2107.74 R4.1@3536.68,2160
NetR5_1: R5.1 SW2.4 | length 156.7
  Bottom Layer w12: R5.1 3603.94,2160.1 3608.76,2155.27 3608.76,2071.24 3619.7,2060.3 3654.7,2060.3 SW2.4@3662.77,2052.23
NetR6_1: R6.1 SW2.1 | length 127.6
  Bottom Layer w10: SW2.1 3819.35,2058.9 3834.03,2073.58 3834.03,2085.09 3834.94,2086 3834.94,2148.87 3846.06,2160 R6.1
NetR7_1: R7.1 U6.12 U6.13 | length 83.8
  Bottom Layer w9.84: U6.13 4405.5,2280.16 4415.34,2290 ; U6.12 4405.5,2299.84 4415.34,2290 ; R7.1 4415.34,2290
NetR8_1: R8.1 U6.14 | length 70.7
  Bottom Layer w9.84: U6.14 4424.76,2260.47 4451.3,2233.94 R8.1
NetR9_1: R9.1 U7.11 | length 103.7
  Bottom Layer w9.84: U7.11 5046.06,2270.47 5062.6,2253.94 R9.1
REC_N: J3.3 U6.19
REC_P: J3.4 U6.18
SPI0_CS0: J1.24 U3.13 U7.6 | length 2756.2
  Top Layer w9.84: v1(4960,2410) 5010,2460 5010,2480 5020,2490 v1(5450,2490)
  Bottom Layer w9.84: U7.6 4939.21,2391.37 4957.85,2410 v1(4960,2410) ; v1(5450,2490) 5516.73,2490 5590,2563.27 U3.13
  Bottom Layer w10: U3.13 5590,2596.73 5813.27,2820 6330,2820 6439.74,2929.74 6818.74,2929.74 6854,2965 6854,3320 6826,3348 6718.5,3348 J1.24
SPI0_CS1: J1.26
SPI0_MISO: J1.21 U3.12 U7.8 | length 2299.1
  Top Layer w9.84: v1(5730,2800) 5760,2830 v1(5760,2880)
  Bottom Layer w9.84: U7.8 4987.11,2329.53 5004.2,2346.61 5026.61,2346.61 5120,2440 5360,2440 5440,2520 5477.47,2520 5521.42,2563.95 5533.63,2563.95 5540,2570.32 U3.12 5540,2596.73 5727.1,2783.83 5727.1,2797.1 v1(5730,2800)
  Bottom Layer w10: v1(5760,2880) 5770,2870 6322.54,2870 6455.53,3002.99 6489.98,3002.99 6630.27,3143.28 6687.68,3143.28 6728.06,3183.66 6728.06,3197.46 6777,3246.4 J1.21
SPI0_MOSI: J1.19 U3.11 U7.7 | length 2192.9
  Top Layer w9.84: v1(5680,2800) 5680,2830 v1(5710,2860)
  Bottom Layer w9.84: U7.7@4981.79,2349.63 4992.15,2360 5020,2360 5113.39,2453.39 5353.39,2453.39 5441.54,2541.54 5449,2541.54 5470.15,2562.69 5483.63,2562.69 5490,2569.05 U3.11 5490,2596.73 5677.1,2783.83 5677.1,2797.1 v1(5680,2800)
  Bottom Layer w10: v1(5710,2860) 5712.87,2857.13 5735.53,2857.13 5742.66,2850 6321.69,2850 6461.14,2989.44 6505.14,2989.44 6645.43,3129.74 6717.24,3129.74 J1.19
SPI0_SCK: J1.23 U3.10 U7.9 | length 2982.9
  Top Layer w9.84: v1(5010,2320) 5010,2323.34 5020,2333.34 v1(5020,2410)
  Bottom Layer w9.84: U7.9 4970.13,2310.26 4996.16,2310.26 5005.9,2320 v1(5010,2320) ; v1(5020,2410) 5041.76,2431.76 5041.76,2447.91 5060.62,2466.77 5343.5,2466.77 5440,2563.27 U3.10
  Bottom Layer w10: U3.10 5442.32,2582.32 5442.32,2612.32 5670,2840 5697.47,2840 5701.02,2836.46 6327.3,2836.46 6434.13,2943.28 6810.74,2943.28 6840.46,2973 6840.46,3282.95 6788.95,3334.46 6675.14,3334.46 6636.76,3372.83 6636.76,3406.17 6660.33,3429.74 6693.67,3429.74 6733.9,3389.5 J1.23
SPI1_CS0: J1.18
SPI1_CS1: J1.16
SPI1_MISO: J1.22
SPI1_MOSI: J1.37
SPI1_SCK: J1.13
TR_N: J3.2 U6.3
TR_P: J3.1 U6.4
uart_rx: J1.10 U1.9 | length 798.1
  Bottom Layer w9.84: U1.9 6181.79,2484.33 6287.92,2590.46 6291.65,2590.46 6416.19,2715 6651.08,2715 6676.58,2689.5 J1.10
UART_RX1: U6.7 U7.24 | length 532.7
  Bottom Layer w9.84: U6.7 4349.21,2419.21 4360,2430 4530,2430 4610.79,2349.21 U7.24
uart_tx: J1.8 U1.11 | length 796
  Bottom Layer w10: U1.11 6232.97,2516.47 6293.5,2577 6297.23,2577 6421.77,2701.54 6564.96,2701.54 J1.8
UART_TX1: U6.22 U7.23
pads on no net: DNP1.2 DNP2.1 DNP3.1 DNP4.2 J1.3 J1.5 J1.11 J1.12 J1.27 J1.28 J1.29 J1.35 J1.36 J1.38 J1.40 SW1.3 SW1.6 SW2.3 SW2.6 U1.10 U6.1 U6.5 U6.8 U6.9 U6.16 U6.23 U6.24
copper on no net: | length 817.1
  Top Layer w10: 6777,3689.5 6846,3620.5 v1(6846,2901)

## Polygon pours and split planes (outlines as drawn)
GND on Top Layer "GND_L01_P000" (solid, remove dead copper, pour order 0): 2890,4935 6945,4935 6945,1375 2890,1375

## Keep-outs
Keep-Out Layer:
  circle w10: c6777,2091 r87.05
  circle w10: c6777,4388 r87.05
  circle w10: c3058,2091 r87.05
  circle w10: c3058,4388 r87.05

## Silkscreen, mask and mechanical layers (free items; w line width, h text height)
Top Overlay:
  text "CAN" at 6371.89,4691.01 h90
  text "TX" at 6420.8,4575 h30
  text "RX" at 6519.22,4575 h30
  text "RX" at 6536.01,1672 h30
  text "TX" at 6627.01,1672 h30
  text "FAN" at 3685.04,1500.01 h90
  text "CAN" at 3141.89,1495.01 h90
  text "IMU" at 6495.54,1451.01 h90
Bottom Overlay:
  text "ON" at 3953,2048 h30
  text "ON" at 3270,2047 h30
  text "TERM / OFF" at 4059.96,1945 h30
  text "TERM / OFF" at 3344.96,1930 h30

## Text inside footprints (layer, text, board x,y; h text height)
U6: Bottom 3D Body "*" at 4246.26,2383 h50 r90
U7: Bottom Overlay "*" at 4855.94,2434.21 h50 r90; Bottom 3D Body "*" at 4855.94,2375.21 h50 r90